# EAGLE board final (EAGLE 7.5.0), part 1 of 2
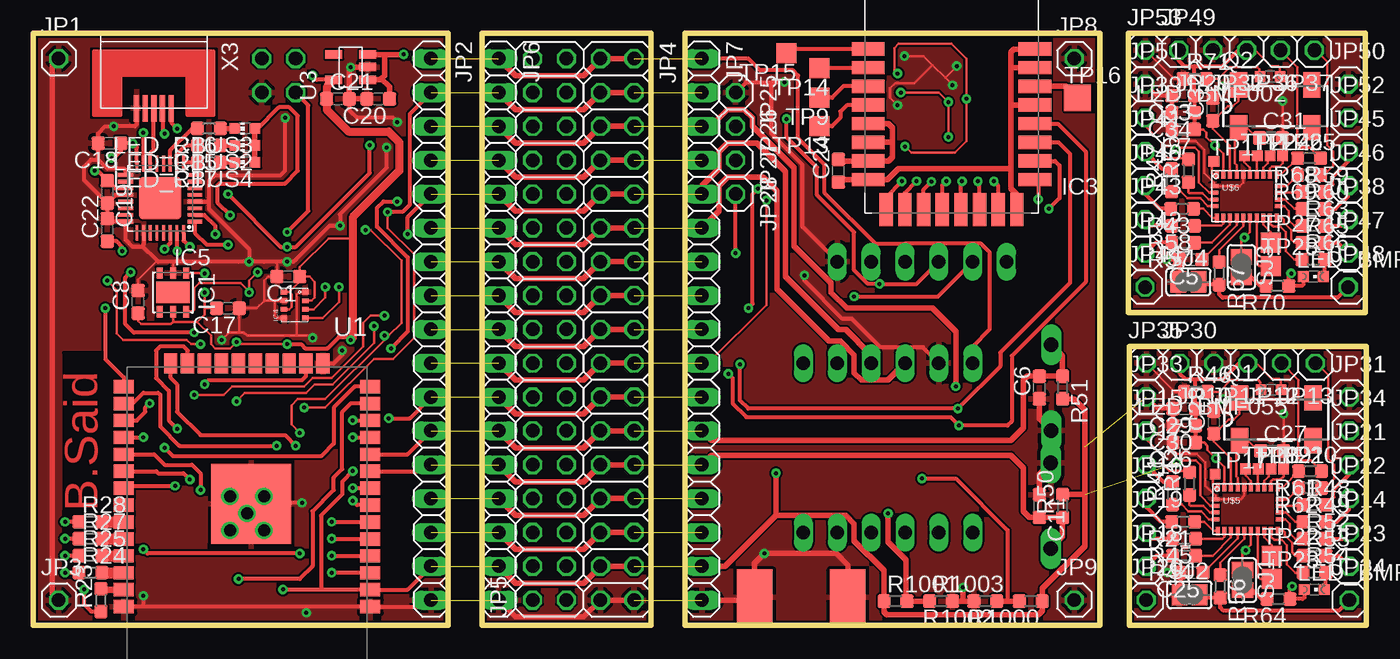
[diagram p0: board, top side]
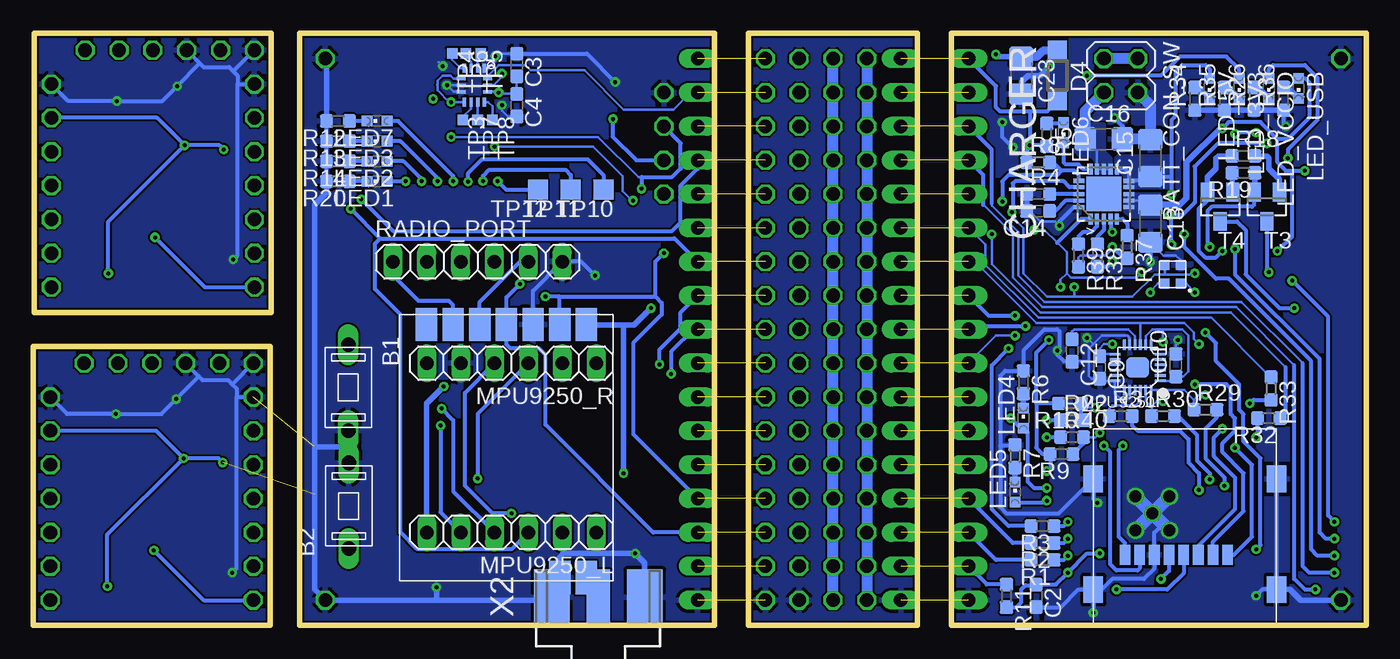
[diagram p1: board, bottom side, seen from below]

Size 100.01 x 44.45 mm. Coordinates in mm from the lower left corner, seen from the top.
Outline: 80.01,0 80.01,44.45 48.9,44.45 48.9,0 80.01,0
Outline: 46.35,0 46.35,44.45 33.66,44.45 33.66,0 46.35,0
Outline: 31.11,0 31.11,44.44 0,44.44 0,0 31.11,0
Outline: 82.23,0 100.01,0 100.01,20.95 82.23,20.95 82.23,0
Outline: 82.15,23.5 99.93,23.5 99.93,44.45 82.15,44.45 82.15,23.5
Copper layers (1*16): Top 0.035mm / dielectric 1.5mm / Bottom 0.035mm
Design rules "gatema_2layers": minimum track width 0.15mm, minimum drill 0.3mm, track to track 0.15mm, track to pad 0.15mm, pad to pad 0.15mm, via to via 0.15mm, smd to smd 0mil, copper to edge 0.15mm, drill to drill 0.4mm, minimum pad ring 0.2mm, minimum via ring 0.2mm, stop-mask expansion 2mil, vias tented up to drill 0.4mm, thermal gap 10mil
bRestrict: 1 lines

## Footprints (pad centres in the part's own frame; a part is rotated, then mirrored left to right if it is on the bottom)
TACTM-35N-F = drill 1.1 long: P$2 3.231,-0.02; P$4 -3.204,-0.02
2X02 = drill 1.016 octagon: 1 -1.27,-1.27; 2 -1.27,1.27; 3 1.27,-1.27; 4 1.27,1.27
C0603 = smd 1 x 1: 1 -0.85,0; 2 0.85,0
C1206 = smd 1.6 x 1.8: 1 -1.4,0; 2 1.4,0
QFN50P400X400X80-21N = smd 0.813 x 0.305: 1 -1.88,0.991; 2 -1.88,0.508; 3 -1.88,0; 4 -1.88,-0.508; 5 -1.88,-0.991; 11 1.88,-0.991; 12 1.88,-0.508; 13 1.88,0; 14 1.88,0.508; 15 1.88,0.991 | smd 0.305 x 0.813: 6 -0.991,-1.88; 7 -0.508,-1.88; 8 0,-1.88; 9 0.508,-1.88; 10 0.991,-1.88; 16 0.991,1.88; 17 0.508,1.88; 18 0,1.88; 19 -0.508,1.88; 20 -0.991,1.88 | smd 2.591 x 2.591: 21 0,0
SOD123 = smd 1.4 x 1.4: A 1.9,0; C -1.9,0
DFN6-3X3 = smd 0.85 x 0.45: 1 -1.45,1; 2 -1.45,0; 3 -1.45,-1; 4 1.45,-1; 5 1.45,0; 6 1.45,1 | smd 1.6 x 2.5: EXP 0,0
DWM1000 = smd 2.45 x 1: 1 -6.25,0.8; 2 -6.25,-0.6; 3 -6.25,-2; 4 -6.25,-3.4; 5 -6.25,-4.8; 6 -6.25,-6.2; 7 -6.25,-7.6; 8 -6.25,-9; 17 6.25,-9; 18 6.25,-7.6; 19 6.25,-6.2; 20 6.25,-4.8; 21 6.25,-3.4; 22 6.25,-2; 23 6.25,-0.6; 24 6.25,0.8 | smd 1 x 2.45: 9 -4.9,-11.25; 10 -3.5,-11.25; 11 -2.1,-11.25; 12 -0.7,-11.25; 13 0.7,-11.25; 14 2.1,-11.25; 15 3.5,-11.25; 16 4.9,-11.25
BMP280 = smd 0.35 x 0.5: 1 0.975,-0.8; 2 0.325,-0.8; 3 -0.325,-0.8; 4 -0.975,-0.8; 5 -0.975,0.8; 6 -0.325,0.8; 7 0.325,0.8; 8 0.975,0.8
QFN32_LONG_PADS = smd 1.2 x 0.3: 1 -2.6,1.75; 2 -2.6,1.25; 3 -2.6,0.75; 4 -2.6,0.25; 5 -2.6,-0.25; 6 -2.6,-0.75; 7 -2.6,-1.25; 8 -2.6,-1.75; 17 2.6,-1.75; 18 2.6,-1.25; 19 2.6,-0.75; 20 2.6,-0.25; 21 2.6,0.25; 22 2.6,0.75; 23 2.6,1.25; 24 2.6,1.75 | smd 0.3 x 1.2: 9 -1.75,-2.6; 10 -1.25,-2.6; 11 -0.75,-2.6; 12 -0.25,-2.6; 13 0.25,-2.6; 14 0.75,-2.6; 15 1.25,-2.6; 16 1.75,-2.6; 25 1.75,2.6; 26 1.25,2.6; 27 0.75,2.6; 28 0.25,2.6; 29 -0.25,2.6; 30 -0.75,2.6; 31 -1.25,2.6; 32 -1.75,2.6 | smd 3.2 x 3.2: EXP 0,0
1X01 = drill 1.016 octagon: 1 0,0
1X17 = drill 1.016 long: 1 -20.32,0; 2 -17.78,0; 3 -15.24,0; 4 -12.7,0; 5 -10.16,0; 6 -7.62,0; 7 -5.08,0; 8 -2.54,0; 9 0,0; 10 2.54,0; 11 5.08,0; 12 7.62,0; 13 10.16,0; 14 12.7,0; 15 15.24,0; 16 17.78,0; 17 20.32,0
2X17 = drill 1.016 octagon: 1 -20.32,-1.27; 2 -20.32,1.27; 3 -17.78,-1.27; 4 -17.78,1.27; 5 -15.24,-1.27; 6 -15.24,1.27; 7 -12.7,-1.27; 8 -12.7,1.27; 9 -10.16,-1.27; 10 -10.16,1.27; 11 -7.62,-1.27; 12 -7.62,1.27; 13 -5.08,-1.27; 14 -5.08,1.27; 15 -2.54,-1.27; 16 -2.54,1.27; 17 0,-1.27; 18 0,1.27; 19 2.54,-1.27; 20 2.54,1.27; 21 5.08,-1.27; 22 5.08,1.27; 23 7.62,-1.27; 24 7.62,1.27; 25 10.16,-1.27; 26 10.16,1.27; 27 12.7,-1.27; 28 12.7,1.27; 29 15.24,-1.27; 30 15.24,1.27; 31 17.78,-1.27; 32 17.78,1.27; 33 20.32,-1.27; 34 20.32,1.27
CHIPLED_0603 = smd 0.8 x 0.8: A 0,-0.75; C 0,0.75
CHIP-LED0603 = smd 0.8 x 0.8: A 0,-0.75; C 0,0.75
LEAD-QFN24 = smd 0.8 x 0.2: 1 -1.7,1; 2 -1.7,0.6; 3 -1.7,0.2; 4 -1.7,-0.2; 5 -1.7,-0.6; 6 -1.7,-1; 13 1.7,-1; 14 1.7,-0.6; 15 1.7,-0.2; 16 1.7,0.2; 17 1.7,0.6; 18 1.7,1 | smd 0.2 x 0.8: 7 -1,-1.7; 8 -0.6,-1.7; 9 -0.2,-1.7; 10 0.2,-1.7; 11 0.6,-1.7; 12 1,-1.7; 19 1,1.7; 20 0.6,1.7; 21 0.2,1.7; 22 -0.2,1.7; 23 -0.6,1.7; 24 -1,1.7 | smd 1.7 x 1.54: 25 0,0
1X06 = drill 1.016 long: 1 -6.35,0; 2 -3.81,0; 3 -1.27,0; 4 1.27,0; 5 3.81,0; 6 6.35,0
MC-306 = smd 1.3 x 1.9: 1 -2.75,-1.6; 2 2.75,-1.6; 3 2.75,1.6; 4 -2.75,1.6
R0603 = smd 1 x 1: 1 -0.85,0; 2 0.85,0
SJ = smd 1.168 x 1.6: 1 -0.762,0; 2 0.762,0
SOT23 = smd 1 x 1.4: 1 -0.95,-1.1; 2 0.95,-1.1; 3 0,1.1
TP08SQ = smd 0.8 x 0.8: TP 0,0
TP15SQ = smd 1.5 x 1.5: TP 0,0
TP20SQ = smd 2 x 2: TP 0,0
ESP-WROOM-32 = smd 1.5 x 1: 1 -9.25,7; 2 -9.25,5.73; 3 -9.25,4.46; 4 -9.25,3.19; 5 -9.25,1.92; 6 -9.25,0.65; 7 -9.25,-0.62; 8 -9.25,-1.89; 9 -9.25,-3.16; 10 -9.25,-4.43; 11 -9.25,-5.7; 12 -9.25,-6.97; 13 -9.25,-8.24; 14 -9.25,-9.51; 25 9.25,-9.51; 26 9.25,-8.24; 27 9.25,-6.97; 28 9.25,-5.7; 29 9.25,-4.43; 30 9.25,-3.16; 31 9.25,-1.89; 32 9.25,-0.62; 33 9.25,0.65; 34 9.25,1.92; 35 9.25,3.19; 36 9.25,4.46; 37 9.25,5.73; 38 9.25,7 | smd 1 x 1.5: 15 -5.7,-11.25; 16 -4.43,-11.25; 17 -3.16,-11.25; 18 -1.89,-11.25; 19 -0.62,-11.25; 20 0.65,-11.25; 21 1.92,-11.25; 22 3.19,-11.25; 23 4.46,-11.25; 24 5.73,-11.25 | smd 6 x 6: GND -0.3,-0.7
SOT23-5 = smd 0.635 x 1.27: P$1 -0.95,-1.27; P$2 0,-1.27; P$3 0.95,-1.27; P$4 0.95,1.27; P$5 -0.95,1.27
HM-TRP = smd 1.6 x 2.5: !CONFIG 10,0.75; !ENABLE 12,0.75; ANT 2,19.75; DRX 8,0.75; DTX 4,0.75; GND 6,0.75; GND_RF 4,19.75; TEST 14,0.75; VCC 2,0.75
MOLEX:47219-2001 = smd 1.45 x 2: G1 13.75,0; G2 13.75,8.3; G3 0,8.3; G4 0,0 | smd 0.8 x 1.5: P1 10.08,2.6; P2 8.98,2.6; P3 7.88,2.6; P4 6.78,2.6; P5 5.68,2.6; P6 4.58,2.6; P7 3.48,2.6; P8 2.38,2.6
LGA14-BMI160 = smd 0.675 x 0.25: P$1 -1.262,0.75; P$2 -1.262,0.25; P$3 -1.262,-0.25; P$4 -1.262,-0.75; P$8 1.262,-0.75; P$9 1.262,-0.25; P$10 1.262,0.25; P$11 1.262,0.75 | smd 0.25 x 0.675: P$5 -0.5,-1.012; P$6 0,-1.012; P$7 0.5,-1.012; P$12 0.5,1; P$13 0,1; P$14 -0.5,1
CHIPLED-4 = smd 0.7 x 0.75: 1 -0.6,0.7; 2 -0.6,-0.7; 3 0.6,-0.7; 4 0.6,0.7
LGA-28 = smd 0.3 x 0.65: P$1 -2.25,1.643; P$6 -2.25,-1.643; P$7 -1.75,-1.643; P$8 -1.25,-1.643; P$9 -0.75,-1.643; P$10 -0.25,-1.643; P$11 0.25,-1.643; P$12 0.75,-1.643; P$13 1.25,-1.643; P$14 1.75,-1.643; P$15 2.25,-1.643; P$20 2.25,1.643; P$21 1.75,1.643; P$22 1.25,1.643; P$23 0.75,1.643; P$24 0.25,1.643; P$25 -0.25,1.643; P$26 -0.75,1.643; P$27 -1.25,1.643; P$28 -1.75,1.643 | smd 0.55 x 0.3: P$2 -2.41,0.75; P$3 -2.41,0.25; P$4 -2.41,-0.25; P$5 -2.41,-0.75; P$16 2.39,-0.75; P$17 2.39,-0.25; P$18 2.39,0.25; P$19 2.39,0.75
J502-ND-142-0711-821/826 = smd 4.191 x 1.778: 1 2.115,0 | smd 4.191 x 2.667: G@1 2.115,3.495; G@2 2.115,-3.495 | smd 4.191 x 2.667 bottom: G@3 2.115,3.495; G@4 2.115,-3.495
USB-MICRO-B-BOTTOM-MOLEX = smd 2 x 0.4: 1 5,1.3; 2 5,0.65; 3 5,0; 4 5,-0.65; 5 5,-1.3

## Placement (x,y rotation side)
B1  TACTM-35N-F  [TACTM-35N-F]  76.36,17.86 270 bottom
B2  TACTM-35N-F  [TACTM-35N-F]  76.36,8.97 90 bottom
BATT_CON_SW  [2X02]  18.41,41.27 270 bottom
C1  100n  [C0603]  19.13,26.19 180 top
C2  1n  [C0603]  24.77,2.22 270 bottom
C3  100n  [C0603]  63.74,42.07 270 bottom
C4  100n  [C0603]  63.74,39.05 270 bottom
C5  100n  [C0603]  86.84,27.46 180 top
C6  100n/16V  [C0603]  75.49,17.86 90 top
C7  100n  [C0603]  86.28,37.23 180 top
C8  100n  [C0603]  7.86,24.29 90 top
C9  100n/16V  [C0603]  20,19.37 270 bottom
C10  10n/16V  [C0603]  14.29,19.53 90 bottom
C11  100n/16V  [C0603]  75.49,8.97 270 top
C12  100n/16V  [C0603]  22.07,20.64 270 bottom
C13  10uF  [C1206]  16.19,30.16 270 bottom
C14  10n  [C0603]  24.61,31.11 180 bottom
C15  22uF  [C1206]  16.19,35.08 90 bottom
C16  22uF  [C1206]  19.68,36.51 0 bottom
C17  100n  [C0603]  14.61,23.81 180 top
C18  100n  [C0603]  5.71,36.2 180 top
C19  4u7  [C0603]  5.56,32.54 270 top
C20  100n  [C0603]  25.88,39.53 180 top
C21  4u7  [C0603]  22.86,39.53 0 top
C22  100n  [C0603]  5.56,29.69 90 top
C23  22u/16V  [C1206]  25.88,41.27 270 bottom
C24  100n  [C0603]  60.4,34.13 90 top
C25  100n  [C0603]  86.92,3.97 180 top
C26  100n  [C0603]  86.36,13.73 180 top
C27  12.5pF  [C0603]  92.95,13.1 0 top
C28  12.5pF  [C0603]  88.58,15.24 90 top
C29  120n  [C0603]  86.36,16.27 180 top
C30  6.8n  [C0603]  86.36,15 180 top
C31  12.5pF  [C0603]  92.87,36.59 0 top
C32  12.5pF  [C0603]  88.5,38.73 90 top
C33  120n  [C0603]  86.28,39.77 180 top
C34  6.8n  [C0603]  86.28,38.5 180 top
CHARGER  ADP5062  [QFN50P400X400X80-21N]  19.68,32.38 90 bottom
D4  skl34  [SOD123]  23.18,41.27 270 bottom
IC1  SI7006-A10-IM  [DFN6-3X3]  10.48,25 270 top
IC3  DWM1000  [DWM1000]  68.9,42.47 0 top
IC4  BMP280  [BMP280]  19.61,24.05 90 top
IC5  FT232R  [QFN32_LONG_PADS]  9.53,32.07 180 top
JP1  [1X01]  1.91,42.55 0 top
JP2  [1X17]  29.84,22.23 270 top
JP3  [1X01]  1.91,1.91 0 top
JP4  [2X17]  43.81,22.23 270 top
JP5  [2X17]  38.73,22.23 90 top
JP6  [1X17]  34.92,22.23 270 top
JP7  [1X17]  50.16,22.23 270 top
JP8  [1X01]  78.11,42.55 0 top
JP9  [1X01]  78.11,1.91 0 top
JP10  [1X01]  88.58,19.68 180 top
JP11  [1X01]  91.12,19.68 180 top
JP12  [1X01]  93.66,19.68 180 top
JP13  [1X01]  96.2,19.68 180 top
JP14  [1X01]  98.74,6.99 0 top
JP15  [1X01]  83.5,14.61 0 top
JP16  [1X01]  83.5,9.53 0 top
JP17  [1X01]  83.5,12.06 0 top
JP18  [1X01]  83.5,4.45 0 top
JP19  [1X01]  83.5,6.99 0 top
JP20  [1X01]  83.5,1.91 0 top
JP21  [1X01]  98.74,12.06 0 top
JP22  [1X01]  98.74,9.53 0 top
JP23  [1X01]  98.74,4.45 0 top
JP24  [1X01]  98.74,1.91 0 top
JP25  [1X01]  52.7,40.01 270 top
JP26  [1X01]  52.7,37.47 270 top
JP27  [1X01]  52.7,34.92 270 top
JP28  [1X01]  52.7,32.38 270 top
JP29  [1X01]  88.5,43.18 180 top
JP30  [1X01]  86.04,19.68 0 top
JP31  [1X01]  98.74,17.14 0 top
JP32  [1X01]  91.04,43.18 180 top
JP33  [1X01]  83.5,17.14 0 top
JP34  [1X01]  98.74,14.61 0 top
JP35  [1X01]  83.5,19.68 0 top
JP36  [1X01]  93.58,43.18 180 top
JP37  [1X01]  96.12,43.18 180 top
JP38  [1X01]  98.66,30.48 0 top
JP39  [1X01]  83.42,38.1 0 top
JP40  [1X01]  83.42,33.02 0 top
JP41  [1X01]  83.42,35.56 0 top
JP42  [1X01]  83.42,27.94 0 top
JP43  [1X01]  83.42,30.48 0 top
JP44  [1X01]  83.42,25.4 0 top
JP45  [1X01]  98.66,35.56 0 top
JP46  [1X01]  98.66,33.02 0 top
JP47  [1X01]  98.66,27.94 0 top
JP48  [1X01]  98.66,25.4 0 top
JP49  [1X01]  85.96,43.18 0 top
JP50  [1X01]  98.66,40.64 0 top
JP51  [1X01]  83.42,40.64 0 top
JP52  [1X01]  98.66,38.1 0 top
JP53  [1X01]  83.42,43.18 0 top
LED1  yellow  [CHIPLED_0603]  74.22,33.34 90 bottom
LED2  yellow  [CHIPLED_0603]  74.22,34.85 90 bottom
LED3  yellow  [CHIPLED_0603]  74.22,36.35 90 bottom
LED4  green  [CHIPLED_0603]  25.72,15.56 0 bottom
LED5  green  [CHIPLED_0603]  26.35,10 0 bottom
LED6  green  [CHIPLED_0603]  22.7,36.99 180 bottom
LED7  yellow  [CHIPLED_0603]  74.22,37.86 90 bottom
LED_3V3  red  [CHIPLED_0603]  9.53,40.32 180 bottom
LED_5V  red  [CHIPLED_0603]  11.75,40.32 180 bottom
LED_BMF  red  [CHIPLED_0603]  96.12,2.7 270 top
LED_BMF001  red  [CHIPLED_0603]  96.04,26.19 270 top
LED_BMF002  red  [CHIPLED_0603]  92.79,41.2 90 top
LED_BMF055  red  [CHIPLED_0603]  92.87,17.7 90 top
LED_CBUS2  yellow  [CHIP-LED0603]  15.88,36.04 90 top
LED_CBUS3  yellow  [CHIP-LED0603]  15.88,37.31 90 top
LED_CBUS4  yellow  [CHIP-LED0603]  15.88,34.77 90 top
LED_USB  red  [CHIPLED_0603]  5.08,40.32 180 bottom
LED_VCCIO  red  [CHIPLED_0603]  7.3,40.32 180 bottom
MPU9250  MPU-9250  [LEAD-QFN24]  17.14,19.37 180 bottom
MPU9250_L  [1X06]  64.14,6.99 180 bottom
MPU9250_R  [1X06]  64.14,19.68 180 bottom
Q1  MC-306  [MC-306]  93.27,15.48 0 top
Q2  MC-306  [MC-306]  93.19,38.97 0 top
R1  470R  [R0603]  24.29,4.92 180 bottom
R2  470R  [R0603]  24.29,6.19 180 bottom
R3  470R  [R0603]  24.29,7.46 180 bottom
R4  10k  [R0603]  24.61,32.38 0 bottom
R5  470R  [R0603]  23.97,36.83 270 bottom
R6  470R  [R0603]  25.72,18.26 270 bottom
R7  470R  [R0603]  26.35,12.7 270 bottom
R8  470R  [R0603]  24.61,34.77 0 bottom
R9  5k  [R0603]  22.86,12.86 180 bottom
R10  5k  [R0603]  22.23,16.67 180 bottom
R11  12k  [R0603]  26.99,2.22 270 bottom
R12  470R  [R0603]  77.15,37.86 180 bottom
R13  470R  [R0603]  77.15,36.35 180 bottom
R14  470R  [R0603]  77.15,34.85 180 bottom
R15  180R  [R0603]  13.18,36.04 180 top
R16  180R  [R0603]  13.18,37.31 180 top
R17  180R  [R0603]  13.18,34.77 180 top
R18  10k  [R0603]  9.21,35.24 0 bottom
R19  10k  [R0603]  9.21,33.97 180 bottom
R20  470R  [R0603]  77.15,33.34 180 bottom
R21  470R  [R0603]  86.28,7.78 180 top
R22  470R  [R0603]  22.07,15.4 0 bottom
R23  470R  [R0603]  5.08,1.91 90 top
R24  470R  [R0603]  4.29,3.97 0 top
R25  470R  [R0603]  4.29,5.24 0 top
R26  470R  [R0603]  8.41,39.53 90 bottom
R27  470R  [R0603]  4.29,6.51 0 top
R28  470R  [R0603]  4.29,7.78 0 top
R29  470R  [R0603]  12.06,16.19 0 bottom
R30  470R  [R0603]  15.24,15.72 0 bottom
R31  470R  [R0603]  18.41,15.72 0 bottom
R32  470R  [R0603]  7.3,15.56 180 bottom
R33  470R  [R0603]  7.14,17.78 270 bottom
R34  470R  [R0603]  12.86,39.53 90 bottom
R35  470R  [R0603]  10.64,39.53 90 bottom
R36  470R  [R0603]  6.19,39.53 90 bottom
R37  470R  [R0603]  17.94,28.42 270 bottom
R38  470R  [R0603]  20.16,27.78 270 bottom
R39  470R  [R0603]  21.59,27.78 270 bottom
R40  470R  [R0603]  22.07,14.13 0 bottom
R41  470R  [R0603]  85.49,9.92 90 top
R42  470R  [R0603]  86.76,10.64 90 top
R43  470R  [R0603]  86.2,31.27 180 top
R44  470R  [R0603]  86.36,5.24 180 top
R45  470R  [R0603]  86.36,6.51 180 top
R46  470R  [R0603]  87.23,17.54 0 top
R47  470R  [R0603]  85.41,33.42 90 top
R48  470R  [R0603]  96.12,9.05 0 top
R49  470R  [R0603]  96.12,7.78 0 top
R50  10k  [R0603]  77.23,8.97 90 top
R51  10k  [R0603]  77.23,17.86 270 top
R52  470R  [R0603]  96.12,6.51 0 top
R53  470R  [R0603]  96.12,5.24 0 top
R54  470R  [R0603]  96.12,3.97 0 top
R55  470R  [R0603]  86.68,34.13 90 top
R56  470R  [R0603]  89.06,2.94 270 top
R57  470R  [R0603]  86.28,28.73 180 top
R58  470R  [R0603]  86.28,30 180 top
R59  470R  [R0603]  96.04,32.54 0 top
R60  470R  [R0603]  96.04,31.27 0 top
R61  470R  [R0603]  95.81,11.59 180 top
R62  470R  [R0603]  95.81,10.32 180 top
R63  470R  [R0603]  96.04,30 0 top
R64  10k  [R0603]  93.42,1.98 180 top
R65  470R  [R0603]  96.04,28.73 0 top
R66  470R  [R0603]  96.04,27.46 0 top
R67  470R  [R0603]  88.98,26.43 270 top
R68  470R  [R0603]  95.73,35.08 180 top
R69  470R  [R0603]  95.73,33.81 180 top
R70  10k  [R0603]  93.34,25.48 180 top
R71  470R  [R0603]  87.15,41.04 0 top
R1000  n/a  [R0603]  74.85,1.83 180 top
R1001  n/a  [R0603]  64.69,1.83 0 top
R1002  n/a  [R0603]  71.44,1.83 180 top
R1003  n/a  [R0603]  68.1,1.83 0 top
RADIO_PORT  [1X06]  66.67,27.3 0 bottom
SJ1  [SJ]  90.73,3.41 270 top
SJ2  [SJ]  86.76,2.3 0 top
SJ3  [SJ]  90.65,26.91 270 top
SJ4  [SJ]  86.68,25.8 0 top
T3  BC337  [SOT23]  7.46,31.43 180 bottom
T4  BC337  [SOT23]  10.95,31.43 180 bottom
TP1  TPTP08SQ  [TP08SQ]  88.58,34.85 0 top
TP2  TPTP08SQ  [TP08SQ]  90.88,35.24 0 top
TP3  TPTP08SQ  [TP08SQ]  67.79,37.94 270 bottom
TP4  TPTP08SQ  [TP08SQ]  68.58,42.94 270 bottom
TP5  TPTP08SQ  [TP08SQ]  66.44,42.94 270 bottom
TP6  TPTP08SQ  [TP08SQ]  67.55,42.94 270 bottom
TP7  TPTP08SQ  [TP08SQ]  66.67,37.94 270 bottom
TP8  TPTP08SQ  [TP08SQ]  65.56,37.94 270 bottom
TP9  TPTP15SQ  [TP15SQ]  58.98,39.61 180 top
TP10  TPTP15SQ  [TP15SQ]  57.23,32.7 180 bottom
TP11  TPTP15SQ  [TP15SQ]  59.69,32.7 180 bottom
TP12  TPTP15SQ  [TP15SQ]  62.15,32.7 180 bottom
TP13  TPTP15SQ  [TP15SQ]  58.98,37.47 180 top
TP14  TPTP15SQ  [TP15SQ]  58.98,41.83 180 top
TP15  TPTP15SQ  [TP15SQ]  56.52,42.94 180 top
TP16  TPTP20SQ  [TP20SQ]  78.34,39.61 0 top
TP17  TPTP08SQ  [TP08SQ]  88.66,11.35 0 top
TP18  TPTP08SQ  [TP08SQ]  90.96,11.75 0 top
TP19  TPTP08SQ  [TP08SQ]  91.92,11.75 0 top
TP20  TPTP08SQ  [TP08SQ]  93.82,11.75 0 top
TP21  TPTP08SQ  [TP08SQ]  92.87,11.75 0 top
TP22  TPTP15SQ  [TP15SQ]  92.95,5.24 0 top
TP23  TPTP15SQ  [TP15SQ]  92.95,3.49 0 top
TP24  TPTP08SQ  [TP08SQ]  91.84,35.24 0 top
TP25  TPTP08SQ  [TP08SQ]  93.74,35.24 0 top
TP26  TPTP08SQ  [TP08SQ]  92.79,35.24 0 top
TP27  TPTP15SQ  [TP15SQ]  92.87,28.73 0 top
TP28  TPTP15SQ  [TP15SQ]  92.87,26.99 0 top
U1  ESP-WROOM-32  [ESP-WROOM-32]  16.03,8.41 180 top
U3  UM18533  [SOT23-5]  23.81,41.91 90 top
U$1  HM-TRP  [HM-TRP]  56.52,23.34 180 bottom
U$2  MOLEX-47219-2001  [MOLEX:47219-2001]  20.48,2.7 0 bottom
U$3  BMI160LGA14  [LGA14-BMI160]  66.91,40.56 270 bottom
U$4  LTR-329ALS-01  [CHIPLED-4]  14.53,26.35 180 bottom
U$5  BMF055  [LGA-28]  91.12,8.73 0 top
U$6  BMF055  [LGA-28]  91.04,32.23 0 top
X2  SMA-142-0711-821/826  [J502-ND-142-0711-821/826]  57.63,0 90 bottom
X3  USB-MICRO-B-BOTTOM  [USB-MICRO-B-BOTTOM-MOLEX]  9.05,43.81 270 top

## Library data of the parts
B1 B2 = TACTM-35N-F
BATT_CON_SW JP1-JP53 MPU9250_L MPU9250_R RADIO_PORT = pinhead
C1-C34 R1-R71 R1000-R1003 = rcl_upravena
CHARGER = OMAT_IC
D4 = diode
IC1 = si70xx; MF: Silicon Labs; MPN: Si7006-A10-IM; OC_FARNELL: unknown; OC_NEWARK: unknown
IC3 = decawave
IC4 = bosch-bmp280
IC5 = ftdichip_upravena
LED1-LED7 LED_3V3 LED_5V LED_BMF LED_BMF001 LED_BMF002 LED_BMF055 LED_CBUS2-LED_CBUS4 LED_USB LED_VCCIO = led
MPU9250 = invensense
Q1 Q2 = crystal; MPN: MC-306 60.0KHZ 100PPM ,12.5PF; OC_FARNELL: 1278040; OC_NEWARK: 31M5576
SJ1-SJ4 = jumper
T3 T4 = transistors
TP1-TP28 = testpad
U1 = esp32
U3 = um185xx
U$1 = HM-TRP
U$2 = molex
U$3 = User-Submitted
U$4 = pimoroni-ics
U$5 U$6 = BMF055
X2 = con-coax; MF: JOHNSON COMPONENTS; MPN: 142-0711-821; OC_FARNELL: 1019328; OC_NEWARK: 16F3627
X3 = usb

## Nets
5V->3V3: C20.1 C23.1 D4.C U3.P$1 U3.P$3
!DTR: IC5.31 R18.1 T4.2
!DTR_B: R18.2 T3.1
!RTS: IC5.32 R19.1 T3.2
!RTS_B: R19.2 T4.1
+3V1: C7.1 C33.1 C34.1 JP32.1 JP49.1 JP52.1 LED_BMF001.A LED_BMF002.A R70.1 U$6.P$3 U$6.P$28
+3V3: C1.1 C3.2 C4.1 C8.1 C9.1 C10.1 C17.2 C21.1 C26.1 C29.1 C30.1 IC1.5 IC4.2 IC4.6 IC4.8 JP2.16 JP4.31 JP4.32 JP6.16 JP7.16 JP11.1 JP26.1 JP30.1 JP34.1 LED_3V3.A LED_BMF055.A LED_BMF.A MPU9250.1 MPU9250.8 MPU9250.13 R9.2 R10.2 R11.1 R50.2 R51.2 R64.1 R1000.1 R1001.1 U1.2 U3.P$5 U$1.VCC U$2.P4 U$3.P$5 U$3.P$8 U$3.P$12 U$4.1 U$5.P$3 U$5.P$28
+5V: C15.1 CHARGER.9 CHARGER.10 CHARGER.11 D4.A JP2.1 JP4.1 JP4.2 JP6.1 JP7.1 LED_5V.A MPU9250_R.6 R5.2 R8.1 R37.2 R39.2 RADIO_PORT.4
BAT_OK: CHARGER.16 R3.2 R8.2
BMF_M0: JP14.1 R52.2
BMF_M1: JP15.1 R42.2
BMF_M2: JP16.1 R21.2
BMF_M3: JP17.1 R41.2
BMF_M4: JP40.1 R43.2
BMF_M5: JP41.1 R47.2
BMF_M6: JP39.1 R55.2
BMF_M7: JP38.1 R63.2
BMF_PA1: JP45.1 R59.2
BMF_PA2: JP46.1 R60.2
BMF_PA3: JP47.1 R65.2
BMF_PA4: JP48.1 R67.2 SJ4.2
BMF_PA20: JP21.1 R48.2
BMF_PA21: JP22.1 R49.2
BMF_PA23: JP23.1 R53.2
BMF_PA28: JP24.1 R56.2 SJ2.2
BMF_RESET: JP20.1 SJ1.1 U$5.P$11
BMF_RESET1: JP44.1 SJ3.1 U$6.P$11
BMF_RX: JP13.1 R62.1
BMF_RX1: JP37.1 R69.1
BMF_SWCLK: JP18.1 R44.2
BMF_SWCLK1: JP42.1 R57.2
BMF_SWDIO: JP19.1 R45.2
BMF_SWDIO1: JP43.1 R58.2
BMF_TX: JP12.1 R61.1
BMF_TX1: JP36.1 R68.1
BTN0: B1.P$4 C6.2 JP2.12 JP4.23 JP4.24 JP6.12 JP7.12 R51.1 U1.10
BTN1: B2.P$4 C11.2 JP2.13 JP4.25 JP4.26 JP6.13 JP7.13 R50.1 U1.9
CBUS2: IC5.10 R15.2
CBUS2_LED: LED_CBUS2.C R15.1
CBUS3: IC5.11 R16.2
CBUS3_LED: LED_CBUS3.C R16.1
CBUS4: IC5.9 R17.2
CBUS4_LED: LED_CBUS4.C R17.1
CS_DECA: IC3.17 JP2.4 JP4.7 JP4.8 JP6.4 JP7.4 R23.1
CS_MPU: MPU9250.22 R31.1
CS_MPU2: JP2.3 JP4.5 JP4.6 JP6.3 JP7.3 MPU9250_L.6 R24.1
EN: C2.1 R11.2 T3.3 U1.3
GND: B1.P$2 B2.P$2 BATT_CON_SW.4 C1.2 C2.2 C3.1 C4.2 C6.1 C8.2 C9.2 C10.2 C11.1 C12.2 C13.2 C14.2 C15.2 C16.2 C17.1 C18.2 C19.2 C20.2 C21.2 C22.2 C23.2 C25.2 C26.2 C27.2 C28.2 C29.2 C30.2 CHARGER.20 IC1.2 IC4.1 IC4.5 IC4.7 IC5.4 IC5.17 IC5.20 IC5.24 IC5.26 JP1.1 JP2.17 JP3.1 JP4.33 JP4.34 JP6.17 JP7.17 JP8.1 JP9.1 JP10.1 JP25.1 JP31.1 JP33.1 JP35.1 MPU9250.11 MPU9250.18 MPU9250.20 MPU9250_R.5 R4.1 R6.1 R7.1 R12.2 R13.2 R14.2 R20.2 R26.1 R34.1 R35.1 R36.1 R38.2 R46.1 R1002.2 R1003.2 RADIO_PORT.6 SJ2.1 U1.1 U1.15 U1.38 U1.GND U3.P$2 U$1.GND U$1.GND_RF U$2.G1 U$2.G2 U$2.G3 U$2.G4 U$2.P6 U$3.P$1 U$3.P$6 U$3.P$7 U$4.2 U$5.P$2 U$5.P$25 X2.G@1 X2.G@2 X2.G@3 X2.G@4 X3.5
GND1: C5.2 C7.2 C31.2 C32.2 C33.2 C34.2 JP29.1 JP50.1 JP51.1 JP53.1 R71.1 SJ4.1 U$6.P$2 U$6.P$25
IO0_!RST: T4.3 U1.25
IO5: R31.2 U1.29
IO16: R33.2 U1.27
IO17: R32.2 U1.28
IO18: R30.2 U1.30
IO19: R29.2 U1.31
IO21: R28.2 U1.33
IO22: R24.2 U1.36
IO23: R23.2 U1.37
IO26: R40.1 U1.11
IO27: R22.1 U1.12
IO34: R3.1 U1.6
LED4: JP2.11 JP4.21 JP4.22 JP6.11 JP7.11 LED4.A U1.8
LED5: LED5.A U1.7
LED_3V1: LED4.C R6.2
LED_3V2: LED5.C R7.2
LED_3V3: LED_VCCIO.C R26.2
LED_3V3_USB: LED_USB.C R36.2
LED_3V3_USB1: LED_3V3.C R35.2
LED_3V3_USB2: LED_BMF055.C R46.2
LED_3V3_USB3: LED_BMF002.C R71.2
LED_3V4: LED_5V.C R34.2
MISO0: IC3.19 JP2.8 JP4.15 JP4.16 JP6.8 JP7.8 MPU9250.24 MPU9250_L.4 R29.1
MOSI0: IC3.18 JP2.7 JP4.13 JP4.14 JP6.7 JP7.7 MPU9250.9 MPU9250_L.3 R28.1
MPU_RX: JP2.5 JP4.9 JP4.10 JP6.5 JP7.5 MPU9250_R.3 R32.1 R1000.2 R1002.1
MPU_TX: JP2.6 JP4.11 JP4.12 JP6.6 JP7.6 MPU9250_R.4 R33.1 R1001.2 R1003.1
N$1: MPU9250.12
N$2: MPU9250.25
N$3: JP5.1 JP5.3 JP5.5 JP5.7 JP5.9 JP5.11 JP5.13 JP5.15 JP5.17 JP5.19 JP5.21 JP5.23 JP5.25 JP5.27 JP5.29 JP5.31 JP5.33
N$4: IC1.3
N$5: C12.1 MPU9250.10
N$6: MPU9250_R.1
N$7: IC1.4
N$8: BATT_CON_SW.3 C16.1 CHARGER.4 CHARGER.12 CHARGER.13 CHARGER.14
N$9: BATT_CON_SW.1 BATT_CON_SW.2
N$10: CHARGER.18 R4.2
N$11: IC5.18
N$12: IC5.8
N$13: IC5.6
N$14: CHARGER.15 LED6.C
N$15: R21.1 U$5.P$6
N$16: U$1.ANT X2.1
N$17: C14.1 CHARGER.19
N$18: LED6.A R5.1
N$19: MPU9250.17
N$20: CHARGER.5 R37.1
N$21: CHARGER.3 R38.1
N$22: CHARGER.2 R39.1
N$23: IC5.7
N$24: MPU9250_R.2
N$25: IC5.3
N$26: IC5.22
N$27: IC5.21
N$28: MPU9250.16
N$29: MPU9250.15
N$30: JP5.2 JP5.4 JP5.6 JP5.8 JP5.10 JP5.12 JP5.14 JP5.16 JP5.18 JP5.20 JP5.22 JP5.24 JP5.26 JP5.28 JP5.30 JP5.32 JP5.34
N$31: R43.1 U$6.P$6
N$32: R47.1 U$6.P$5
N$33: LED1.C R20.1
N$34: LED2.C R14.1
N$35: U1.17
N$36: U1.18
N$37: U1.19
N$38: U1.22
N$39: U1.21
N$40: U1.20
N$41: MPU9250.14
N$42: MPU9250.6
N$43: MPU9250.7
N$44: MPU9250.21
N$45: MPU9250.2
N$46: MPU9250.3
N$47: MPU9250.4
N$48: MPU9250.5
N$49: MPU9250.19
N$50: MPU9250_L.2
N$51: MPU9250_L.1
N$52: LED3.C R13.1
N$53: IC3.22 TP16.TP
N$54: R41.1 U$5.P$5
N$55: C24.1 IC3.8 IC3.16 IC3.21 IC3.23 IC3.24
N$56: C24.2 IC3.5 IC3.6 IC3.7
N$57: R42.1 U$5.P$4
N$58: LED7.C R12.1
N$59: IC3.12 LED7.A
N$60: IC3.13 LED3.A
N$61: TP5.TP U$3.P$2
N$62: TP6.TP U$3.P$3
N$63: TP7.TP U$3.P$10
N$64: TP8.TP U$3.P$11
N$65: TP4.TP U$3.P$4
N$66: TP3.TP U$3.P$9
N$67: IC3.14 LED2.A
N$68: IC5.27
N$69: IC5.28
N$70: IC3.15 LED1.A
N$71: IC3.11 TP10.TP
N$72: IC3.3 TP9.TP
N$73: IC3.10 TP11.TP
N$74: IC3.9 TP12.TP
N$75: IC3.4 TP13.TP
N$76: IC3.2 TP14.TP
N$77: IC3.1 TP15.TP
N$78: TP17.TP U$5.P$1
N$79: R44.1 U$5.P$8
N$80: R45.1 U$5.P$7
N$81: C28.1 Q1.4 U$5.P$27
N$82: C27.1 Q1.1 U$5.P$26
N$83: R48.1 U$5.P$18
N$84: R49.1 U$5.P$17
N$85: R52.1 U$5.P$16
N$86: R53.1 U$5.P$15
N$87: R54.1 U$5.P$14
N$88: TP23.TP U$5.P$12
N$89: R56.1 U$5.P$10
N$90: TP18.TP U$5.P$24
N$91: TP19.TP U$5.P$23
N$92: TP20.TP U$5.P$21
N$93: TP21.TP U$5.P$22
N$94: R61.2 U$5.P$20
N$95: R62.2 U$5.P$19
N$96: TP22.TP U$5.P$13
N$97: LED_BMF.C R54.2
N$98: U$1.TEST
N$99: C25.1 U$5.P$9
N$100: R64.2 SJ1.2
N$101: R55.1 U$6.P$4
N$102: TP1.TP U$6.P$1
N$103: R57.1 U$6.P$8
N$104: R58.1 U$6.P$7
N$105: R59.1 U$6.P$18
N$106: R60.1 U$6.P$17
N$107: R63.1 U$6.P$16
N$108: R65.1 U$6.P$15
N$109: R66.1 U$6.P$14
N$110: TP28.TP U$6.P$12
N$111: R67.1 U$6.P$10
N$112: TP2.TP U$6.P$24
N$113: TP24.TP U$6.P$23
N$114: TP25.TP U$6.P$21
N$115: TP26.TP U$6.P$22
N$116: R68.2 U$6.P$20
N$117: R69.2 U$6.P$19
N$118: TP27.TP U$6.P$13
N$119: LED_BMF001.C R66.2
N$120: C5.1 U$6.P$9
N$121: C32.1 Q2.4 U$6.P$27
N$122: C31.1 Q2.1 U$6.P$26
N$123: R70.2 SJ3.2
RADIO_CF: RADIO_PORT.5 U$1.!CONFIG
RADIO_EN: RADIO_PORT.1 U$1.!ENABLE
RADIO_RX: JP2.15 JP4.29 JP4.30 JP6.15 JP7.15 JP27.1 R1.2 RADIO_PORT.3 U$1.DRX
RADIO_TX: JP2.14 JP4.27 JP4.28 JP6.14 JP7.14 JP28.1 R2.2 RADIO_PORT.2 U$1.DTX
RXD0: IC5.30 R27.1
RXD0_: R27.2 U1.34
SCK0: IC3.20 JP2.9 JP4.17 JP4.18 JP6.9 JP7.9 MPU9250.23 MPU9250_L.5 R30.1
SCL0: CHARGER.1 IC1.6 IC4.4 JP2.10 JP4.19 JP4.20 JP6.10 JP7.10 R9.1 R40.2 U$3.P$13 U$4.4
SD_CLK: U1.13 U$2.P5
SD_CMD: U1.23 U$2.P3
SD_DAT0: U1.24 U$2.P7
SD_DAT1: U1.26 U$2.P8
SD_DAT2: U1.14 U$2.P1
SD_DAT3: U1.16 U$2.P2
SDA0: CHARGER.17 IC1.1 IC4.3 JP2.2 JP4.3 JP4.4 JP6.2 JP7.2 R10.1 R22.2 U$3.P$14 U$4.3
SENSOR_VN_: R2.1 U1.5
SENSOR_VP_: R1.1 U1.4
TXD0: IC5.2 R25.1
TXD0_: R25.2 U1.35
U2_NC1: U3.P$4
USBDM: IC5.15 X3.2
USBDP: IC5.14 X3.3
V+: C13.1 C19.1 C22.1 CHARGER.6 CHARGER.7 CHARGER.8 IC5.19 LED_USB.A X3.1
VCCIO: C18.1 IC5.1 IC5.16 LED_CBUS2.A LED_CBUS3.A LED_CBUS4.A LED_VCCIO.A